# EAGLE board matrix_io_board (EAGLE 6.6.0)
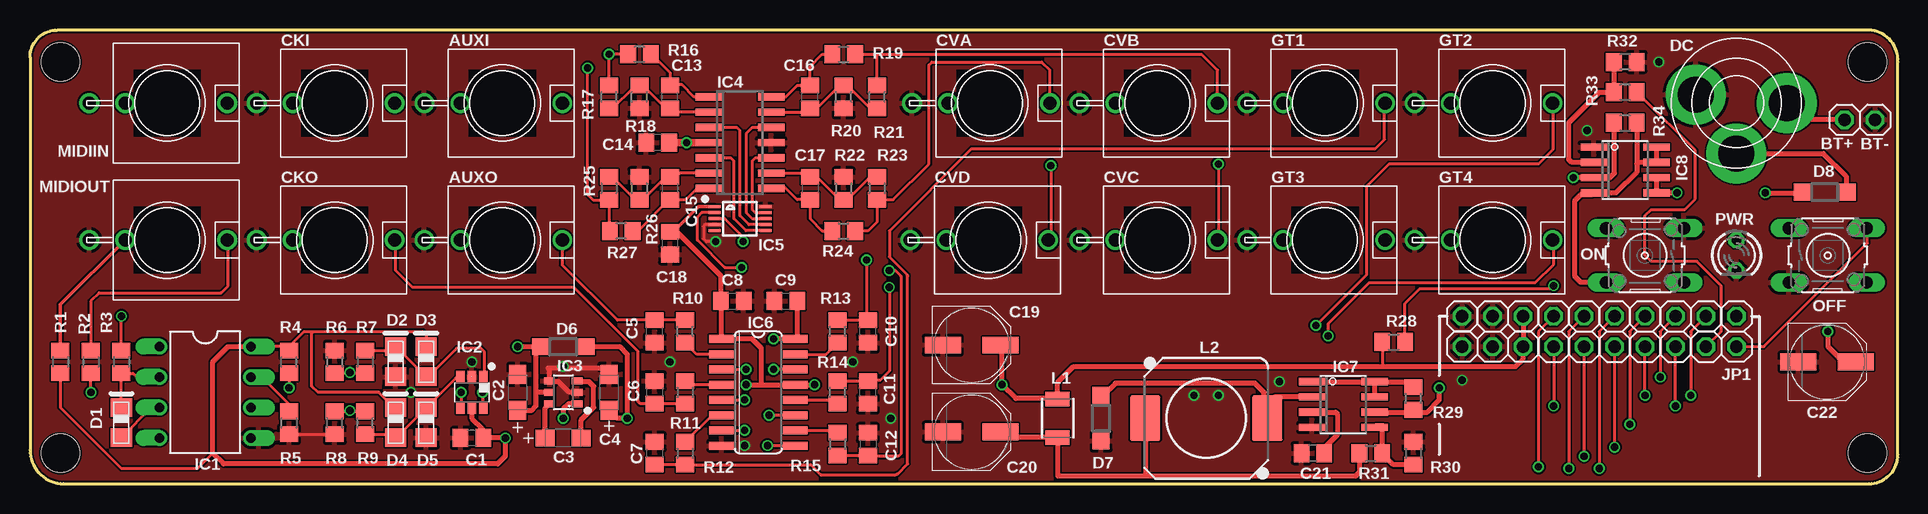
[diagram p0: board, top side]
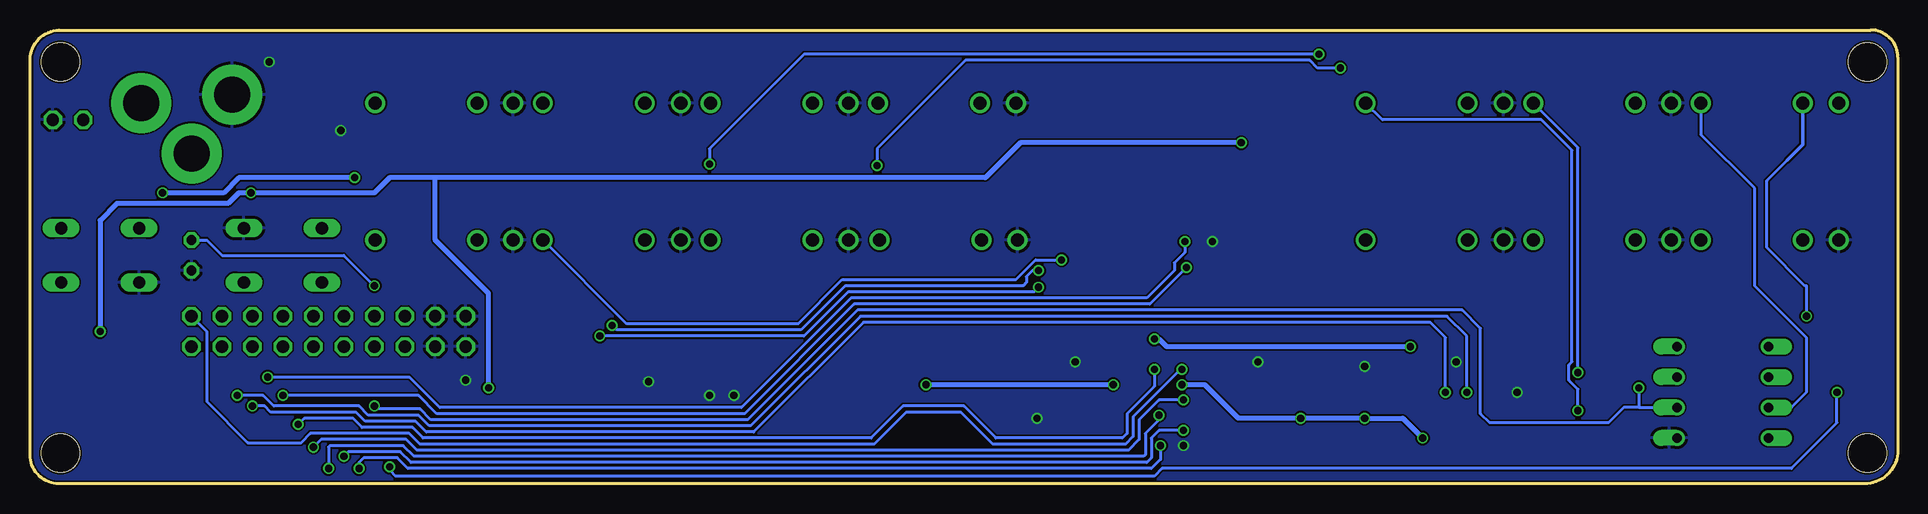
[diagram p1: board, bottom side, seen from below]

Size 155.7 x 37.85 mm. Coordinates in mm from the lower left corner, seen from the top.
Outline: 0,35.56 0,2.79 arc90 2.79,0 153.29,0 arc90 155.7,2.41 155.7,35.18 arc90 153.29,37.85 2.29,37.85 arc90 0,35.56
Copper layers (1*16): Top 0.035mm / dielectric 1.5mm / Bottom 0.035mm
Design rules "hackvana": minimum track width 6mil, minimum drill 0.3mm, track to track 6mil, track to pad 9mil, pad to pad 6mil, via to via 6mil, smd to smd 0mil, copper to edge 6mil, drill to drill 6mil, minimum pad ring 10mil, minimum via ring 6mil, stop-mask expansion 2mil, vias tented up to drill 100mil, thermal gap 10mil
Holes 3.2 mm at 2.54,2.54 153.16,2.54 2.54,35.18 153.16,35.18

## Footprints (pad centres in the part's own frame; a part is rotated, then mirrored left to right if it is on the bottom)
1X01 = drill 1.016 octagon: 1 0,0
WQP-PJ301M-12_JACK = drill 1.1: P$1 0,5; P$2 0,-3.5; P$3 0,-6.5
C0805 = smd 1.3 x 1.5: 1 -0.95,0; 2 0.95,0
SMC_A = smd 1.6 x 1.4: + -1.5,0; - 1.5,0
PANASONIC_D = smd 3 x 1.4: + 2.4,0; - -2.4,0
0805DIODE = smd 1.524 x 1.778: A -1.262,-0.005; C 1.238,-0.005
SOD123 = smd 1.4 x 1.4: A 1.9,0; C -1.9,0
PWR_SOCKET_2_1MM = drill 3 pad 5: BARREL 0,4.2; NC -4.2,0; PIN 3.4,-0.7
DIL08 = drill 0.813 offset: 1 -3.81,-3.81; 2 -1.27,-3.81; 3 1.27,-3.81; 4 3.81,-3.81; 5 3.81,3.81; 6 1.27,3.81; 7 -1.27,3.81; 8 -3.81,3.81
DBV_R-PDSO-G6 = smd 0.69 x 0.99: 1 -0.95,-1.29; 2 0,-1.29; 3 0.95,-1.29; 4 0.95,1.3; 5 0,1.3; 6 -0.95,1.3
SOT23-6 = smd 0.6 x 0.9: 1 -0.95,-1.15; 2 0,-1.15; 3 0.95,-1.15; 4 0.95,1.15; 5 0,1.15; 6 -0.95,1.15
SO14 = smd 0.6 x 2.2: 1 -3.81,-2.6; 2 -2.54,-2.6; 3 -1.27,-2.6; 4 0,-2.6; 5 1.27,-2.6; 6 2.54,-2.6; 7 3.81,-2.6; 8 3.81,2.6; 9 2.54,2.6; 10 1.27,2.6; 11 0,2.6; 12 -1.27,2.6; 13 -2.54,2.6; 14 -3.81,2.6
MSOP10 = smd 0.25 x 1: 1 -1,-2.113; 2 -0.5,-2.113; 3 0,-2.113; 4 0.5,-2.113; 5 1,-2.113; 6 1,2.113; 7 0.5,2.113; 8 0,2.113; 9 -0.5,2.113; 10 -1,2.113
SO16 = smd 0.66 x 2.032: 1 -4.445,-3.073; 2 -3.175,-3.073; 3 -1.905,-3.073; 4 -0.635,-3.073; 5 0.635,-3.073; 6 1.905,-3.073; 7 3.175,-3.073; 8 4.445,-3.073; 9 4.445,3.073; 10 3.175,3.073; 11 1.905,3.073; 12 0.635,3.073; 13 -0.635,3.073; 14 -1.905,3.073; 15 -3.175,3.073; 16 -4.445,3.073
SOIC8 = smd 0.6 x 2.2: 1 -1.905,-2.6; 2 -0.635,-2.6; 3 0.635,-2.6; 4 1.905,-2.6; 5 1.905,2.6; 6 0.635,2.6; 7 -0.635,2.6; 8 -1.905,2.6
1210 = smd 1.2 x 2: 1 -1.6,0; 2 1.6,0
DR1030 = smd 3.81 x 2.54: 1 0,5.085; 2 0,-5.085
WQP-PJ301M-ST = drill 1.1: P$1 0,5; P$2 0,-3.5; P$3 0,-6.5
B3F-10XX = drill 1.016 long: 1 -3.251,2.261; 2 3.251,2.261; 3 -3.251,-2.261; 4 3.251,-2.261
LED3MM = drill 0.813 octagon: A -1.27,0; K 1.27,0
R0805 = smd 1.3 x 1.5: 1 -0.95,0; 2 0.95,0

## Placement (x,y rotation side)
5V  [1X01]  124.46,13.97 0 top
5V.  [1X01]  124.46,11.43 0 top
AUXI  WQP-PJ301M-12_JACK  [WQP-PJ301M-12_JACK]  39.37,31.75 270 top
AUXO  WQP-PJ301M-12_JACK  [WQP-PJ301M-12_JACK]  39.37,20.32 270 top
BT+  [1X01]  151.26,30.35 0 top
BT-  [1X01]  153.8,30.35 0 top
C1  100n  [C0805]  36.83,3.81 180 top
C2  10u  [SMC_A]  40.64,7.62 90 top
C3  10u  [SMC_A]  44.45,3.81 0 top
C4  10u  [SMC_A]  48.26,7.62 90 top
C5  10n  [C0805]  52.07,12.7 90 top
C6  10n  [C0805]  52.07,7.62 270 top
C7  10n  [C0805]  52.07,2.54 270 top
C8  100n  [C0805]  58.55,15.24 0 top
C9  100n  [C0805]  62.99,15.24 0 top
C10  10n  [C0805]  69.85,12.7 90 top
C11  10n  [C0805]  69.85,7.62 90 top
C12  10n  [C0805]  69.85,3.3 270 top
C13  20p  [C0805]  53.34,32.26 90 top
C14  [C0805]  52.32,28.45 180 top
C15  [C0805]  53.34,24.64 270 top
C16  [C0805]  65.02,32.26 90 top
C17  [C0805]  65.02,24.64 270 top
C18  100n  [C0805]  53.34,20.07 270 top
C19  [PANASONIC_D]  78.49,11.56 0 top
C20  [PANASONIC_D]  78.49,4.32 0 top
C21  470p  [C0805]  106.93,2.54 180 top
C22  [PANASONIC_D]  149.8,10.16 0 top
CKI  WQP-PJ301M-12_JACK  [WQP-PJ301M-12_JACK]  25.4,31.75 270 top
CKO  WQP-PJ301M-12_JACK  [WQP-PJ301M-12_JACK]  25.4,20.32 270 top
CKOUT  [1X01]  142.24,13.97 90 top
CLKIN  [1X01]  137.16,11.43 90 top
CVA  WQP-PJ301M-12_JACK  [WQP-PJ301M-12_JACK]  80.01,31.75 270 top
CVB  WQP-PJ301M-12_JACK  [WQP-PJ301M-12_JACK]  93.98,31.75 270 top
CVC  WQP-PJ301M-12_JACK  [WQP-PJ301M-12_JACK]  93.98,20.32 270 top
CVD  WQP-PJ301M-12_JACK  [WQP-PJ301M-12_JACK]  79.88,20.32 270 top
D1  0805DIODE  [0805DIODE]  7.62,5.08 270 top
D2  0805DIODE  [0805DIODE]  30.48,10.16 270 top
D3  0805DIODE  [0805DIODE]  33.02,10.16 270 top
D4  0805DIODE  [0805DIODE]  30.48,5.08 270 top
D5  0805DIODE  [0805DIODE]  33.02,5.08 270 top
D6  MBR0520LT  [SOD123]  44.45,11.43 0 top
D7  MBR0520LT  [SOD123]  89.28,5.46 270 top
D8  MBR0520LT  [SOD123]  149.61,24.32 0 top
DC  PWR_SOCKET_2_1MM  [PWR_SOCKET_2_1MM]  142.24,31.75 180 top
G1  [1X01]  129.54,11.43 90 top
G2  [1X01]  132.08,11.43 90 top
G3  [1X01]  134.62,13.97 90 top
G4  [1X01]  132.08,13.97 90 top
GD1  [1X01]  121.92,13.97 90 top
GD2  [1X01]  121.92,11.43 0 top
GD3  [1X01]  119.38,11.43 0 top
GD4  [1X01]  119.38,13.97 0 top
GT1  WQP-PJ301M-12_JACK  [WQP-PJ301M-12_JACK]  107.95,31.75 270 top
GT2  WQP-PJ301M-12_JACK  [WQP-PJ301M-12_JACK]  121.92,31.75 270 top
GT3  WQP-PJ301M-12_JACK  [WQP-PJ301M-12_JACK]  107.95,20.32 270 top
GT4  WQP-PJ301M-12_JACK  [WQP-PJ301M-12_JACK]  121.92,20.32 270 top
IC1  6N138  [DIL08]  14.61,7.62 270 top
IC2  SN74LVC2G14  [DBV_R-PDSO-G6]  36.83,7.62 180 top
IC3  LM27675M5_CHARGEPUMP  [SOT23-6]  44.45,7.62 90 top
IC4  LM324D  [SO14]  59.18,28.45 270 top
IC5  MCP4728_QUAD_DAC  [MSOP10]  59.18,22.1 270 top
IC6  4504D  [SO16]  60.71,7.62 270 top
IC7  SP34063A_BOOST_REG  [SOIC8]  109.47,6.6 270 top
IC8  FDS8958B  [SOIC8]  132.97,26.16 270 top
L1  [1210]  85.66,5.46 90 top
L2  [DR1030]  98.04,5.46 90 top
MIDIIN  THONKICONN_STEREO  [WQP-PJ301M-ST]  11.43,31.75 270 top
MIDIOUT  THONKICONN_STEREO  [WQP-PJ301M-ST]  11.43,20.32 270 top
OFF  [B3F-10XX]  149.86,19.05 0 top
OFFSW  [1X01]  142.24,11.43 0 top
ON  [B3F-10XX]  134.62,19.05 180 top
PWR  [LED3MM]  142.24,19.05 270 top
PWRCTL  [1X01]  139.7,11.43 90 top
R1  220  [R0805]  2.54,10.16 270 top
R2  220  [R0805]  5.08,10.16 270 top
R3  220  [R0805]  7.62,10.16 270 top
R4  1k8  [R0805]  21.59,10.16 90 top
R5  1k8  [R0805]  21.59,5.08 270 top
R6  100k  [R0805]  25.4,10.16 270 top
R7  1k  [R0805]  27.94,10.16 270 top
R8  100k  [R0805]  25.4,5.08 90 top
R9  1k  [R0805]  27.94,5.08 90 top
R10  1k  [R0805]  54.61,12.7 90 top
R11  1k  [R0805]  54.61,7.62 270 top
R12  1k  [R0805]  54.61,2.54 270 top
R13  1k  [R0805]  67.31,12.7 90 top
R14  1k  [R0805]  67.31,7.62 90 top
R15  1k  [R0805]  67.31,3.3 270 top
R16  1k  [R0805]  50.8,35.81 180 top
R17  10k/0.1%  [R0805]  48.26,32.26 90 top
R18  10k/0.1%  [R0805]  50.8,32.26 90 top
R19  1k  [R0805]  67.82,35.81 0 top
R20  10k/0.1%  [R0805]  67.82,32.26 90 top
R21  10k/0.1%  [R0805]  70.61,32.26 90 top
R22  10k/0.1%  [R0805]  67.82,24.64 270 top
R23  10k/0.1%  [R0805]  70.61,24.64 270 top
R24  1k  [R0805]  67.82,21.08 0 top
R25  10k/0.1%  [R0805]  48.26,24.64 270 top
R26  10k/0.1%  [R0805]  50.8,24.64 270 top
R27  1k  [R0805]  49.28,21.08 180 top
R28  1k  [R0805]  113.67,11.81 0 top
R29  0r33  [R0805]  115.32,7.11 90 top
R30  1k  [R0805]  115.32,2.54 270 top
R31  3k  [R0805]  111.76,2.54 0 top
R32  10k  [R0805]  132.97,35.18 180 top
R33  1k  [R0805]  132.97,32.64 180 top
R34  10k  [R0805]  132.97,30.1 0 top
RSIN  [1X01]  139.7,13.97 0 top
RSOUT  [1X01]  129.54,13.97 90 top
RX  [1X01]  127,11.43 90 top
SCL  [1X01]  134.62,11.43 90 top
SDA  [1X01]  137.16,13.97 90 top
TX  [1X01]  127,13.97 90 top

## Library data of the parts
5V 5V. BT+ BT- CKOUT CLKIN G1-G4 GD1-GD4 OFFSW PWRCTL RSIN RSOUT RX SCL SDA TX = pinhead
AUXI AUXO CKI CKO CVA CVB CVC CVD GT1-GT4 = thonkiconn
C1-C22 R1-R34 = rcl
D1-D5 = jasons_stuff
D6-D8 = diode
DC IC2 IC3 IC5 IC7 IC8 L2 MIDIIN MIDIOUT = jason_eagle6
IC1 = optocoupler; MF: VISHAY/TELEFUNKEN; MPN: 6N138; OC_FARNELL: 9860150; OC_NEWARK: 35K5294
IC4 = linear
IC6 = 45xx
L1 = SparkFun
OFF ON = switch-omron; MPN: B3F-1000; OC_FARNELL: 176432; OC_NEWARK: 36M3542
PWR = led

## Nets
+5V: 5V.1 5V..1 C1.1 C4.+ C8.1 C18.1 C19.+ D3.A D4.A D6.A IC1.8 IC2.5 IC3.1 IC5.1 IC6.1 IC6.13 L1.2 R1.2 R4.2 R28.1
+9V: C14.1 C22.+ IC4.4 IC7.6 IC8.5 IC8.6 R29.1
+10V: C2.+ C9.2 D6.C IC3.5 IC6.16
AUXGATE: IC6.9 RSOUT.1
CLKOUT: CKOUT.1 IC6.3
GATE1: G3.1 IC6.14
GATE2: G2.1 IC6.5
GATE3: G1.1 IC6.7
GATE4: G4.1 IC6.11
GND: AUXI.P$3 AUXO.P$3 BT-.1 C1.2 C2.- C4.- C5.1 C6.1 C7.1 C8.2 C9.1 C10.1 C11.1 C12.1 C14.2 C18.2 C19.- C20.- C21.2 C22.- CKI.P$3 CKO.P$3 CVA.P$3 CVB.P$3 CVC.P$3 CVD.P$3 D2.C D5.C D7.A DC.PIN GD1.1 GD2.1 GD3.1 GD4.1 GT1.P$3 GT2.P$3 GT3.P$3 GT4.P$3 IC1.5 IC2.2 IC3.2 IC3.4 IC4.11 IC5.4 IC5.10 IC6.8 IC7.4 IC8.1 MIDIOUT.P$3 OFF.3 ON.3 PWR.K R5.2 R6.1 R8.1 R18.1 R20.1 R22.1 R26.1 R30.1 R32.1
MIDI_IN: IC1.6 R4.1 RX.1
MIDI_OUT: R2.2 TX.1
N$1: MIDIOUT.P$2 R1.1
N$2: D1.A IC1.2 R3.2
N$3: IC4.3 IC5.7
N$4: D1.C IC1.3 MIDIIN.P$1
N$5: IC1.7 R5.1
N$6: MIDIOUT.P$1 R2.1
N$7: MIDIIN.P$2 R3.1
N$8: CVC.P$1 R16.2 R17.2
N$9: CVD.P$1 R25.2 R27.2
N$10: CVB.P$1 R19.2 R21.2
N$11: CVA.P$1 R23.2 R24.2
N$12: C13.2 IC4.1 R16.1
N$13: C15.2 IC4.7 R27.1
N$14: C17.2 IC4.8 R24.1
N$15: C16.2 IC4.14 R19.1
N$16: BT+.1 DC.NC
N$17: C16.1 IC4.13 R20.2 R21.1
N$18: C17.1 IC4.9 R22.2 R23.1
N$19: IC6.10 R15.1
N$20: C15.1 IC4.6 R25.1 R26.2
N$22: C13.1 IC4.2 R17.1 R18.2
N$23: CLKIN.1 IC2.6
N$24: AUXI.P$1 R8.2 R9.2
N$25: IC2.4 RSIN.1
N$26: D4.C D5.A IC2.3 R9.1
N$27: C12.2 GT2.P$1 R15.2
N$29: IC4.5 IC5.6
N$30: IC4.10 IC5.9
N$31: IC4.12 IC5.8
N$32: IC7.1 IC7.7 IC7.8 R29.2
N$33: IC7.5 R30.2 R31.2
N$34: C21.1 IC7.3
N$35: D7.C IC7.2 L2.2
N$36: D8.A DC.BARREL
N$37: IC6.2 R10.1
N$38: C3.+ IC3.6
N$39: C3.- IC3.3
N$40: IC6.4 R11.1
N$41: IC6.6 R12.1
N$43: IC6.12 R14.1
N$44: AUXO.P$1 C5.2 R10.2
N$45: C6.2 CKO.P$1 R11.2
N$46: C7.2 GT1.P$1 R12.2
N$47: C11.2 GT4.P$1 R14.2
N$48: C10.2 GT3.P$1 R13.2
N$49: IC6.15 R13.1
N$51: C20.+ L1.1 L2.1 R31.1
N$53: D2.A D3.C IC2.1 R7.1
N$54: CKI.P$1 R6.2 R7.2
N$56: PWR.A R28.2
N$61: IC8.4 IC8.7 IC8.8 ON.2 R34.2
N$62: IC8.2 R32.2 R33.2
OFF_SW: OFF.2 OFFSW.1
PWR_CTRL: PWRCTL.1 R33.1
SCL: IC5.2 SCL.1
SDA: IC5.3 SDA.1
VIN: D8.C IC8.3 R34.1

## Tracks (layer width: path | path; a pad name or v marks a point on that pad's centre or on a via)
+5V  (via drill 0.6)
  Top 0.254: D4.A 30.36,6.34 29.08,7.62 24,7.62 23.5,8.13 23.5,12.57 23.62,12.7 | 23.62,12.7 22.86,12.7 21.59,11.43 | 23.62,12.7 32.77,12.7 33.02,12.45 D3.A | 37.72,4.57 37.72,3.87 C1.1 37.72,3.75 | 21.59,11.43 IC1.8 | R4.2 21.59,11.43 | R28.1 112.72,9.85 112.65,9.78 | R1.2 2.54,6.35 7.62,1.27 13.97,1.27 15.24,2.54
  Top 0.305: IC5.1 55.74,23.1 53.65,21.02 C18.1
  Top 0.406: D6.A 49.15,11.43 49.78,10.79 v49.78,5.46 48.92,5.46 C4.+ 48.28,6.1 | 60.96,8.26 60.96,11.3 60.2,12.07 IC6.1 57.6,12.1 C8.1 57.6,17.33 53.85,21.08 53.41,21.08 C18.1 53.66,21.34 | IC3.1 44.9,6.67 44.45,6.22 v44.45,5.46 | C1.1 v39.62,3.81 39.62,2.29 38.99,1.65 16.13,1.65 15.24,2.54 15.24,10.16 16.51,11.43 IC1.8 | IC2.5 36.83,5.46 37.72,4.57 | 21.27,11.43 R4.2 | 5V.1 5V..1 124.46,10.41 123.83,9.78 112.65,9.78 87,9.78 85.66,8.45 L1.2 85.61,7.11 82.17,7.11 v81.03,8.26 81.03,11.42 C19.+ | v59.69,8.26 60.96,8.26 | 60.96,8.26 IC6.13 v65.41,8.26
  Bottom 0.406: v39.62,3.81 41.27,5.46 v44.45,5.46 v49.78,5.46 54.99,5.46 57.78,8.26 v59.69,8.26 | v65.41,8.26 v81.03,8.26
+9V  (via drill 0.6)
  Top 0.406: IC7.6 115.12,5.97 R29.1 115.32,6.1 115.44,5.97 116.46,5.97 117.48,6.99 v117.48,8 | IC8.6 IC8.5 v137.29,24.26 | v149.86,12.7 149.86,11.43 151.13,10.16 C22.+
  Top 0.61: C14.1 v54.74,28.45 IC4.4
  Bottom 0.406: v54.74,28.45 73.15,28.45 76.07,25.53 121.92,25.53 | 121.92,25.53 125.73,25.53 127,24.26 v137.29,24.26 138.3,24.26 139.19,23.37 148.46,23.37 149.86,21.97 v149.86,12.7 | v117.48,8 117.48,15.88 121.92,20.32 121.92,25.53
+10V  (via drill 0.6)
  Top 0.406: 40.54,6.22 C2.+ 40.66,6.1 41.78,6.1 42.16,6.48 42.16,7.62 | C9.2 63.94,12.23 IC6.16 v61.98,12.07 | 42.16,7.62 42.16,11.43 D6.C v40.64,11.43 | IC3.5 42.16,7.62
  Bottom 0.406: v61.98,12.07 61.59,12.07 60.96,11.43 v40.64,11.43
AUXGATE  (via drill 0.6)
  Top 0.254: IC6.9 v61.47,3.18 | RSOUT.1 128.27,12.7 v128.27,1.27
  Bottom 0.254: v61.47,3.18 61.47,2.03 62.23,1.27 124.21,1.27 125.09,2.16 127.89,2.16 128.27,1.78 v128.27,1.27
CLKOUT  (via drill 0.6)
  Top 0.254: IC6.3 v59.69,9.53
  Bottom 0.254: v59.69,9.53 59.82,9.53 63.75,5.59 63.75,3.94 64.39,3.3 75.44,3.3 78.11,5.97 82.68,5.97 85.34,3.3 123.19,3.3 124.08,4.19 132.33,4.19 133.1,3.43 137.54,3.43 140.97,6.86 140.97,12.7 CKOUT.1
GATE1  (via drill 0.6)
  Top 0.254: IC6.14 v61.98,9.53 | G3.1 133.35,12.7 v133.35,4.95
  Bottom 0.254: v61.98,9.53 61.98,8.13 64.26,5.84 64.26,4.19 64.64,3.81 75.18,3.81 77.85,6.48 82.93,6.48 85.6,3.81 122.94,3.81 123.83,4.7 128.02,4.7 128.78,5.46 132.84,5.46 v133.35,4.95
GATE2  (via drill 0.6)
  Top 0.254: IC6.5 v59.56,6.99 | G2.1 v132.08,3.05
  Bottom 0.254: v59.56,6.99 61.59,6.99 63.25,5.33 63.25,3.68 64.14,2.79 123.44,2.79 124.33,3.68 131.44,3.68 v132.08,3.05
GATE3  (via drill 0.6)
  Top 0.254: IC6.7 v59.56,4.45 | G1.1 v129.54,2.29
  Bottom 0.254: v59.56,4.45 61.59,4.45 62.23,3.81 62.23,2.16 62.61,1.78 123.95,1.78 124.84,2.67 129.16,2.67 v129.54,2.29
GATE4  (via drill 0.6)
  Top 0.254: IC6.11 v61.59,5.71 | G4.1 130.81,12.7 v130.81,1.27
  Bottom 0.254: v61.59,5.71 61.59,5.33 62.74,4.19 62.74,2.41 62.87,2.29 123.7,2.29 124.59,3.18 130.68,3.18 130.81,3.05 v130.81,1.27
GND  (via drill 0.6)
  Top 0.254: R5.2 R8.1 | IC5.4 56.27,21.6 56.13,21.46 56.13,20.45 56.39,20.19 v57.15,20.19
  Top 0.406: C2.- 40.64,9.53 40.51,9.65 | C4.- 47.73,9.65 43.18,9.65 43.3,9.53 IC3.4 43.36,8.51 44.07,8.51 44.96,7.62 IC3.2
  other vias: 71.76,5.46 68.58,10.16 59.56,3.18 36.83,10.16 31.75,7.62 44.45,9.78 53.34,10.16 119.38,8.64 104.14,8.51 97.03,7.37 99.06,7.37 135.76,35.18 129.79,29.46
  pour Top: -3.81,41.91 -3.81,-2.54 160.02,-2.54 160.02,43.18 -3.81,43.18
  pour Bottom: -5.08,43.18 -5.08,-5.08 161.29,-5.08 161.29,43.18
MIDI_IN  (via drill 0.6)
  Top 0.254: R4.1 21.66,9.21 | 21.91,9.21 21.66,9.21 | 21.66,9.21 21.59,9.14 v21.59,8 | RX.1 v127,6.48
  Bottom 0.254: 21.59,6.35 IC1.6 | v21.59,8 21.59,6.35 | 21.59,6.35 22.86,6.35 24.13,5.08 34.04,5.08 34.8,5.84 34.8,12.95 36.32,14.48 86.74,14.48 95.89,5.33 122.3,5.33 123.19,6.22 126.75,6.22 v127,6.48
MIDI_OUT  (via drill 0.6)
  Top 0.254: TX.1 125.73,12.7 v125.73,1.4 | v5.08,7.62 R2.2
  Bottom 0.254: v125.73,1.4 125.73,1.14 125.22,0.64 61.98,0.64 61.34,1.27 8.89,1.27 5.08,5.08 v5.08,7.62
N$1
  Top 0.305: R1.1 2.54,14.93 MIDIOUT.P$2
N$2
  Top 0.254: D1.A R3.2 8.57,9.21 8.89,8.89 IC1.2
N$3
  Top 0.254: IC5.7 59.94,21.6 59.18,22.35 59.18,29.46 58.93,29.72 IC4.3
N$4
  Top 0.254: IC1.3 10.12,6.35 D1.C
  Bottom 0.254: IC1.3 8.89,6.35 7.62,7.62 7.62,12.19 11.94,16.51 11.94,24.64 16.43,29.13 MIDIIN.P$1
N$5
  Top 0.254: IC1.7 19.3,8.89 21.59,6.6 R5.1
N$6
  Top 0.254: R2.1 5.08,15.24 5.76,15.92 15.92,15.92 16.51,16.51 16.51,20.24 MIDIOUT.P$1
N$7  (via drill 0.6)
  Top 0.254: R3.1 v7.62,13.97
  Bottom 0.254: v7.62,13.97 7.62,16.51 7.75,16.51 10.92,19.68 10.92,25.27 9.21,26.99
  Bottom 0.305: MIDIIN.P$2 7.93,28.27 9.21,26.99
N$8  (via drill 0.6)
  Top 0.254: 49.53,35.56 49.6,35.56 R16.2 v48.26,35.81 R17.2 | v99.06,26.67 99.06,20.4 CVC.P$1
  Bottom 0.254: v48.26,35.81 91.19,35.81 99.06,27.94 v99.06,26.67
N$9  (via drill 0.6)
  Top 0.254: R25.2 48.26,23.62 | 48.26,23.62 46.99,23.62 46.48,24.13 v46.48,34.67 | v85.09,26.54 85.09,20.53 CVD.P$1 | 48.26,23.62 48.26,21.15 R27.2
  Bottom 0.254: v46.48,34.67 48.39,34.67 49.02,35.31 77.72,35.31 85.09,27.94 v85.09,26.54
N$10
  Top 0.254: R21.2 70.61,35.81 | R19.2 70.61,35.81 | 70.61,35.81 97.66,35.81 98.98,34.5 CVB.P$1
N$11
  Top 0.254: R24.2 69.85,21.08 70.61,21.84 R23.2 71.95,23.69 74.93,26.67 74.93,34.92 75.18,35.18 84.33,35.18 85.01,34.5 CVA.P$1
N$12
  Top 0.254: IC4.1 55.37,32.26 54.36,33.27 53.41,33.27 C13.2 53.34,34.29 51.82,35.81 R16.1
N$13
  Top 0.254: IC4.7 55.63,24.64 54.68,23.69 C15.2 53.28,23.69 50.8,21.21 50.35,21.21 R27.1
N$14
  Top 0.254: R24.1 66.04,21.08 65.02,22.1 C17.2 63.94,23.69 62.99,24.64 IC4.8
N$15
  Top 0.254: IC4.14 62.99,32.26 63.94,33.21 C16.2 65.02,34.8 66.04,35.81 R19.1
N$16
  Top 0.406: BT+.1 147.84,30.35 DC.NC
N$17
  Top 0.254: IC4.13 64.7,30.99 C16.1 65.6,31.31 67.06,32.77 67.38,32.77 R20.2 68.14,33.21 69.85,31.5 70.42,31.5 R21.1
N$18
  Top 0.254: IC4.9 64.7,25.91 C17.1 65.6,25.59 67.31,23.88 67.63,23.88 R22.2 68.14,23.69 70.04,25.59 R23.1
N$19
  Top 0.254: IC6.10 67.12,4.45 R15.1
N$20
  Top 0.254: 53.91,25.65 C15.1 | IC4.6 54.17,25.91 C15.1 | R25.1 48.58,25.59 50.04,24.13 50.36,24.13 R26.2 51.12,23.69 52.83,25.4 53.15,25.4 C15.1
N$22
  Top 0.254: R17.1 48.58,31.31 50.29,33.02 50.61,33.02 R18.2 51.12,33.21 52.83,31.5 53.15,31.5 C13.1 53.66,30.99 IC4.2
N$23  (via drill 0.6)
  Top 0.254: v37.72,7.62 37.72,6.38 IC2.6 | v137.16,6.48 CLKIN.1
  Bottom 0.254: v37.72,7.62 37.72,12.19 38.99,13.46 86.23,13.46 95.38,4.32 122.68,4.32 123.57,5.21 127.76,5.21 128.52,5.97 135.64,5.97 136.14,6.48 v137.16,6.48
N$24  (via drill 0.6)
  Top 0.254: R8.2 R9.2 26.74,6.03 v26.67,6.1
  Bottom 0.254: v26.67,6.1 26.67,7.87 27.43,8.64 27.43,9.91 27.18,10.16 27.18,27.81 29.72,30.35 42.97,30.35 AUXI.P$1
N$25  (via drill 0.6)
  Top 0.254: v35.94,7.62 35.94,6.38 IC2.4 | RSIN.1 138.43,12.7 v138.43,7.37
  Bottom 0.254: v35.94,7.62 35.94,12.32 37.59,13.97 86.49,13.97 95.63,4.83 122.43,4.83 123.32,5.71 127.51,5.71 128.27,6.48 135.38,6.48 136.27,7.37 v138.43,7.37
N$26
  Top 0.254: R9.1 30.19,4.13 D4.C 30.52,3.84 D5.A 35.52,8.84 35.81,8.84 IC2.3
N$27  (via drill 0.6)
  Top 0.254: R15.2 C12.2 69.92,2.29 72.39,2.29 72.64,2.54 72.64,17.17 arc45 72.57,17.35 72.14,17.78 v71.63,17.78 | GT2.P$1 126.92,27.86 125.73,26.67 113.28,26.67 111.38,24.77 111.38,17.4 v107.19,13.21
  Bottom 0.254: v71.63,17.78 72.14,17.78 72.64,17.27 72.64,16.76 72.9,16.51 87.76,16.51 91.44,12.83 106.81,12.83 v107.19,13.21
N$29
  Top 0.254: IC5.6 59.67,21.1 58.67,22.1 58.67,26.92 58.42,27.18 IC4.5
N$30
  Top 0.254: IC4.10 60.45,27.18 60.2,26.92 60.2,22.86 60.45,22.61 61.29,22.61 IC5.9
N$31
  Top 0.254: IC4.12 60.2,29.72 59.69,29.21 59.69,22.61 60.2,22.1 IC5.8
N$32
  Top 0.406: IC7.8 114.87,8.51 R29.2 | IC7.8 IC7.7 | IC7.1 IC7.8
N$33
  Top 0.406: R30.2 113.66,1.59 R31.2 112.71,4.76 112.78,4.83 112.2,4.83 IC7.5
N$34
  Top 0.406: C21.1 107.88,2.98 108.97,4.06 108.97,5.84 108.84,5.97 IC7.3
N$35
  Top 0.406: IC7.2 103.76,7.24 102.87,6.35 | 102.87,6.35 102.87,5.72 L2.2 | 102.87,6.35 102.87,7.62 102.11,8.38 90.47,8.38 89.45,7.36 D7.C
N$36
  Top 0.406: DC.BARREL 149.49,27.55 151.38,25.65 151.38,24.44 D8.A
N$37
  Top 0.254: IC6.2 55.56,10.79 R10.1
N$38
  Top 0.406: C3.+ 42.95,6.32 IC3.6
N$39
  Top 0.406: C3.- 45.95,5.31 46.99,6.35 46.99,8.13 46.61,8.51 45.66,8.51 IC3.3
N$40
  Top 0.254: IC6.4 54.92,8.26 R11.1
N$41
  Top 0.254: IC6.6 56.83,5.71 R12.1
N$43
  Top 0.254: IC6.12 67,6.99 R14.1
N$44
  Top 0.254: R10.2 C5.2 48.96,13.65 44.37,18.24 AUXO.P$1
N$45
  Top 0.254: 53.41,6.67 R11.2 C6.2 50.86,6.67 50.67,6.86 50.67,11.05 45.34,16.38 31.88,16.38 30.48,17.78 30.48,20.24 CKO.P$1
N$46
  Top 0.254: C7.2 R12.2 65.09,1.59 65.91,0.76 72.16,0.76 arc45 72.34,0.84 73.15,1.65 73.15,17.29 arc45 73.08,17.47 71.63,18.92 71.63,21.08 78.49,27.94 112.14,27.94 112.9,28.7 112.9,31.7 GT1.P$1
N$47  (via drill 0.6)
  Top 0.254: R14.2 C11.2 69.92,8.64 70.87,8.64 71.63,9.4 v71.63,16.38 | GT4.P$1 127,20.24 127,18.29 125.48,16.76 111.63,16.76 108.2,13.34 v108.2,12.32
  Bottom 0.254: v71.63,16.38 72.01,16 87.5,16 91.19,12.32 v108.2,12.32
N$48  (via drill 0.6)
  Top 0.254: R13.2 C10.2 69.72,13.78 v69.72,18.67
  Bottom 0.254: v69.72,18.67 71.88,18.67 73.53,17.02 88.01,17.02 91.69,13.34 105.97,13.34 GT3.P$1
N$49
  Top 0.254: IC6.15 66.36,10.79 R13.1
N$51
  Top 0.406: R31.1 110.81,0.96 110.49,0.64 92.96,0.64 | 92.96,0.64 85.73,0.64 85.66,0.7 L1.1 81.34,3.86 C20.+ | L2.1 92.96,0.64
N$53
  Top 0.254: R7.1 30.16,11.11 D2.A 30.52,11.42 D3.C 33.18,8.92 35.56,11.3 37.59,11.3 37.85,11.05 37.85,8.98 IC2.1
N$54  (via drill 0.6)
  Top 0.254: R6.2 R7.2 26.73,9.21 v26.67,9.27
  Bottom 0.254: v26.67,9.27 26.67,28.02 CKI.P$1
N$56  (via drill 0.6)
  Top 0.254: v127,16.51 126.75,16.26 115.82,16.26 114.62,15.05 R28.2
  Bottom 0.254: PWR.A 140.97,20.32 139.7,19.05 129.54,19.05 v127,16.51
N$61
  Top 0.406: IC8.8 IC8.7 134.05,26.8 133.92,26.67 | R34.2 133.92,26.67 | 133.92,26.67 133.92,25.97 132.21,24.26 IC8.4 130.24,24.13 129.29,24.13 128.78,23.62 128.78,17.27 129.26,16.79 ON.2
N$62
  Top 0.406: IC8.2 128.52,26.8 128.27,27.05 128.27,30.1 130.81,32.64 R33.2 R32.2
OFF_SW
  Top 0.254: OFFSW.1 144.53,11.43 153.16,20.07 153.16,21.26 OFF.2
PWR_CTRL
  Top 0.254: PWRCTL.1 140.97,12.7 140.97,16.51 138.94,18.54 135.13,18.54 134.62,19.05 134.62,22.35 135.13,22.86 137.92,22.86 138.81,23.75 138.81,27.81 134.37,32.26 134.3,32.26 R33.1
SCL  (via drill 0.6)
  Top 0.254: IC5.2 56,22.6 55.63,22.23 55.63,20.32 57.91,18.03 v59.31,18.03 | v134.62,7.37 SCL.1
  Bottom 0.254: v59.31,18.03 62.36,14.99 87,14.99 96.14,5.84 121.79,5.84 123.32,7.37 v134.62,7.37
SDA  (via drill 0.6)
  Top 0.254: IC5.3 57.91,22.1 59.44,20.57 v59.44,20.19 | SDA.1 135.89,12.7 v135.89,8.89
  Bottom 0.254: v59.44,20.19 59.44,19.3 60.32,18.41 60.32,17.78 62.61,15.49 87.25,15.49 96.39,6.35 121.54,6.35 123,7.81 123.06,7.87 124.08,8.89 v135.89,8.89
VIN  (via drill 0.6)
  Top 0.406: R34.1 132.08,30.04 132.08,25.91 131.7,25.53 IC8.3 v128.65,25.53 | v144.65,24.26 147.64,24.26 D8.C
  Bottom 0.406: v128.65,25.53 138.3,25.53 139.57,24.26 v144.65,24.26

## Text on the board
tPlace: JP1 | + | + | +
bDocu: NOODLEBOX I/O BOARD V5 | CC-BY-NC-SA | By Jason Hotchkiss, 2020